# EAGLE board part 1 (EAGLE 9.5.0)
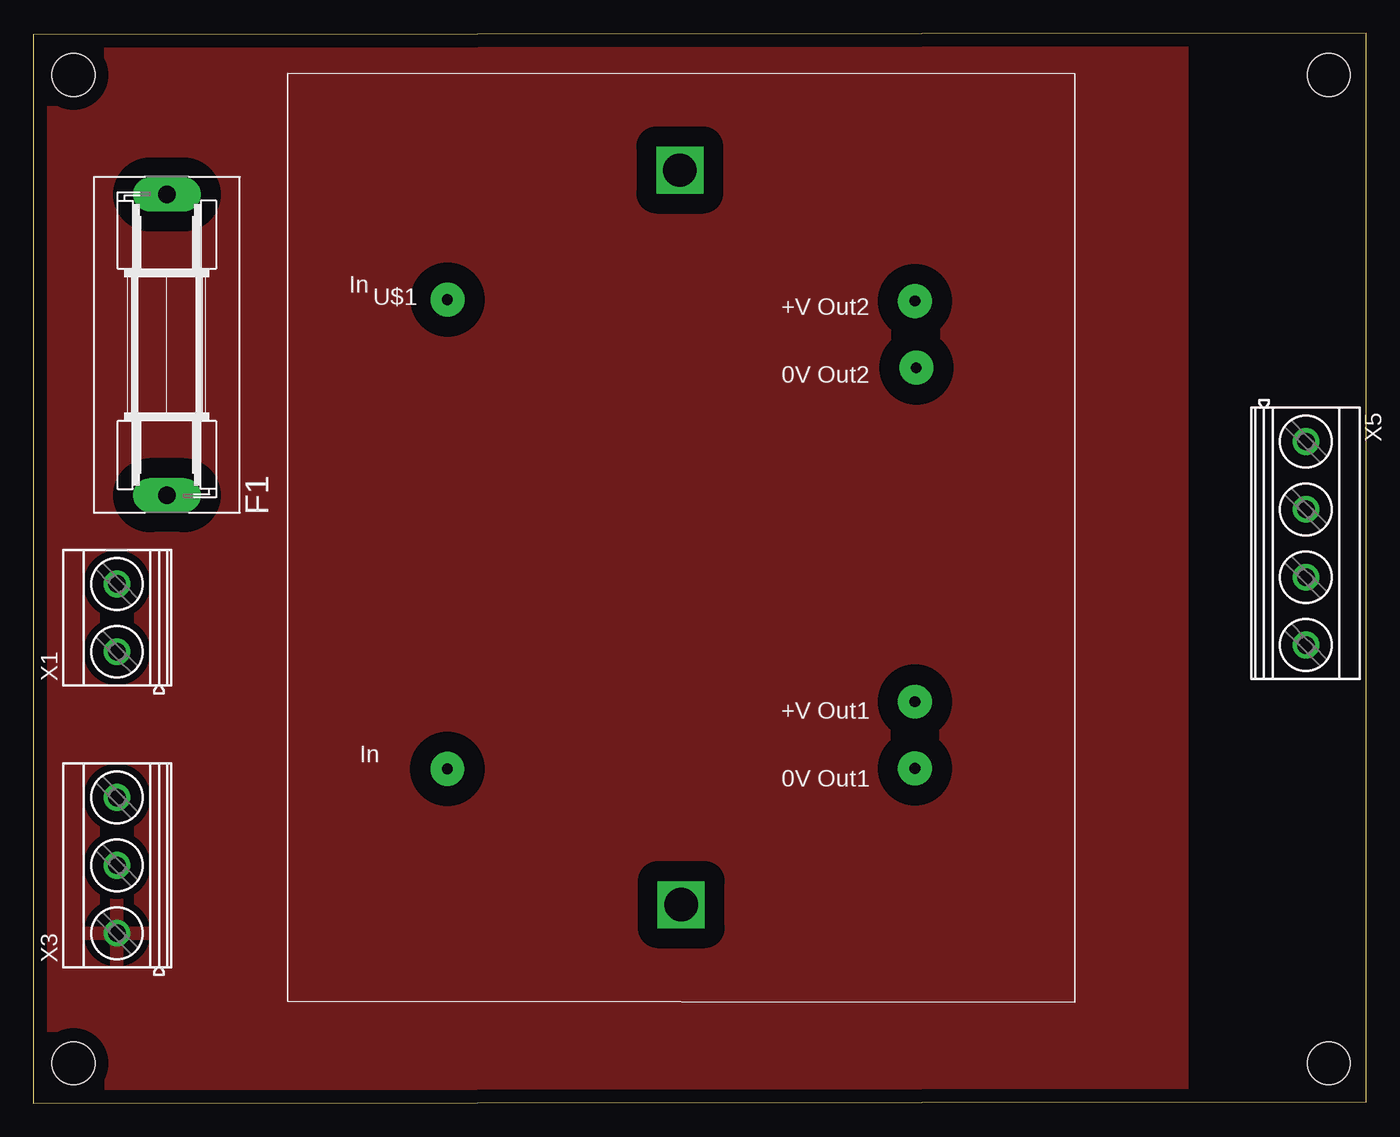
[diagram p0: board, top side]
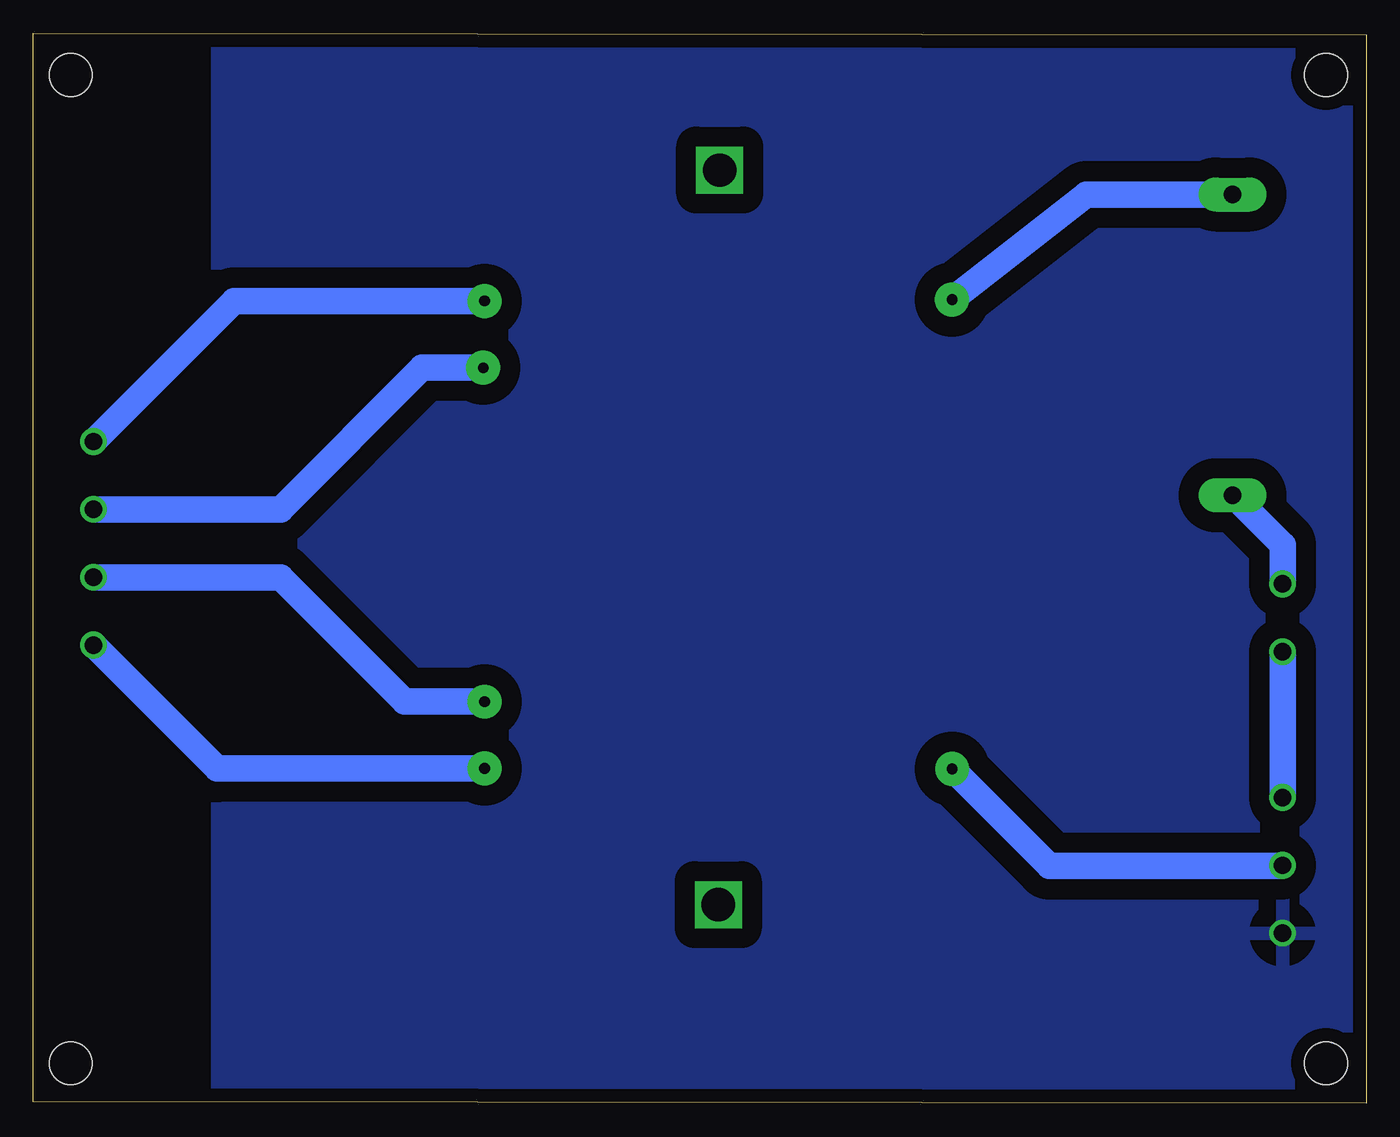
[diagram p1: board, bottom side, seen from below]

Size 99.78 x 80.11 mm. Coordinates in mm from the lower left corner, seen from the top.
Outline: 0,0 99.78,0.11 99.78,80.11 0,80 0,0
Copper layers (1*16): Top 0.035mm / dielectric 1.5mm / Bottom 0.035mm
Design rules "default *": minimum track width 6mil, minimum drill 0.35mm, track to track 1.5mm, track to pad 1.5mm, pad to pad 1.5mm, via to via 1.5mm, smd to smd 1.5mm, copper to edge 40mil, drill to drill 6mil, minimum pad ring 10mil, minimum via ring 8mil, stop-mask expansion 4mil, vias tented up to drill 0mil, thermal gap 1.5mm
Holes 3.2 mm at 3,3 3,77 97,77 97,3

## Footprints (pad centres in the part's own frame; a part is rotated, then mirrored left to right if it is on the bottom)
SH22,5A = drill 1.321 pad 2.54 long: 1 -11.252,0; 2 11.252,0
2ISO = drill 0.8 pad 2.54: 1 11.948,52.551; 5 11.942,17.416; 6 46.948,17.451; 7 46.948,22.451; 9 47.048,47.451; 10 46.948,52.451 | drill 2.5 square: P$1 29.448,7.251; P$2 29.348,62.251
MKDSN1,5/2-5,08 = drill 1.3 pad 2: 1 -2.561,0.025; 2 2.519,0.025
MKDSN1,5/3-5,08 = drill 1.3 pad 2: 1 -7.641,0.025; 2 -2.561,0.025; 3 2.519,0.025
MKDSN1,5/4-5,08 = drill 1.3 pad 2: 1 -7.641,0.025; 2 -2.561,0.025; 3 2.519,0.025; 4 7.599,0.025

## Placement (x,y rotation side)
F1  [SH22,5A]  9.99,56.79 90 top
U$1  [2ISO]  19.05,7.62 0 top
X1  MKDSN1,5/2-5,08  [MKDSN1,5/2-5,08]  6.28,36.37 90 top
X3  MKDSN1,5/3-5,08  [MKDSN1,5/3-5,08]  6.28,20.38 90 top
X5  MKDSN1,5/4-5,08  [MKDSN1,5/4-5,08]  95.25,41.91 270 top

## Library data of the parts
F1 = fuse; MPN: 0031.7701.11; OC_FARNELL: unknown; OC_NEWARK: 04F1224
U$1 = myrra
X1 X3 X5 = con-phoenix-508

## Nets
N$1: U$1.6 X5.4
N$2: F1.1 X1.2
N$3: U$1.7 X5.3
N$4: F1.2 U$1.1
N$5: U$1.9 X5.2
N$6: X1.1 X3.3
N$7: U$1.10 X5.1
N$10: U$1.5 X3.2
PE: X3.1

## Tracks (layer width: path | path; a pad name or v marks a point on that pad's centre or on a via)
N$1
  Bottom 2: U$1.6 86.03,25.07 X5.4
N$2  (via drill 0.35)
  Bottom 2: X1.2 6.25,41.8 F1.1
  other vias: 9.99,45.54
N$3
  Bottom 1.016: 95.25,39.37 X5.3
  Bottom 2: U$1.7 71.98,30.07 81.28,39.37 95.25,39.37
N$4
  Bottom 2: F1.2 20.94,68.04 U$1.1
N$5
  Bottom 1.016: 95.25,44.45 X5.2
  Bottom 2: U$1.9 70.66,55.07 81.28,44.45 95.25,44.45
N$6
  Bottom 2: X3.3 X1.1
N$7
  Bottom 2: U$1.10 84.75,60.07 X5.1
N$10
  Bottom 2: U$1.5 23.71,17.76 6.32,17.76 X3.2
PE
  pour Bottom: 0,80.01 0,0 85.98,-0.22 85.98,79.79
  pour Top: 0,80.01 0,0 85.98,-0.22 85.98,79.79